# Altium PCB Projekat.PcbDoc
Units mm, origin at the board's own origin, x right, y up, seen from the top; angles counter-clockwise.
Board outline 81.41 x 129.5 mm, 2 copper layers (F.Cu, B.Cu); 62 components, 67 nets, 209 pads, 16 vias.
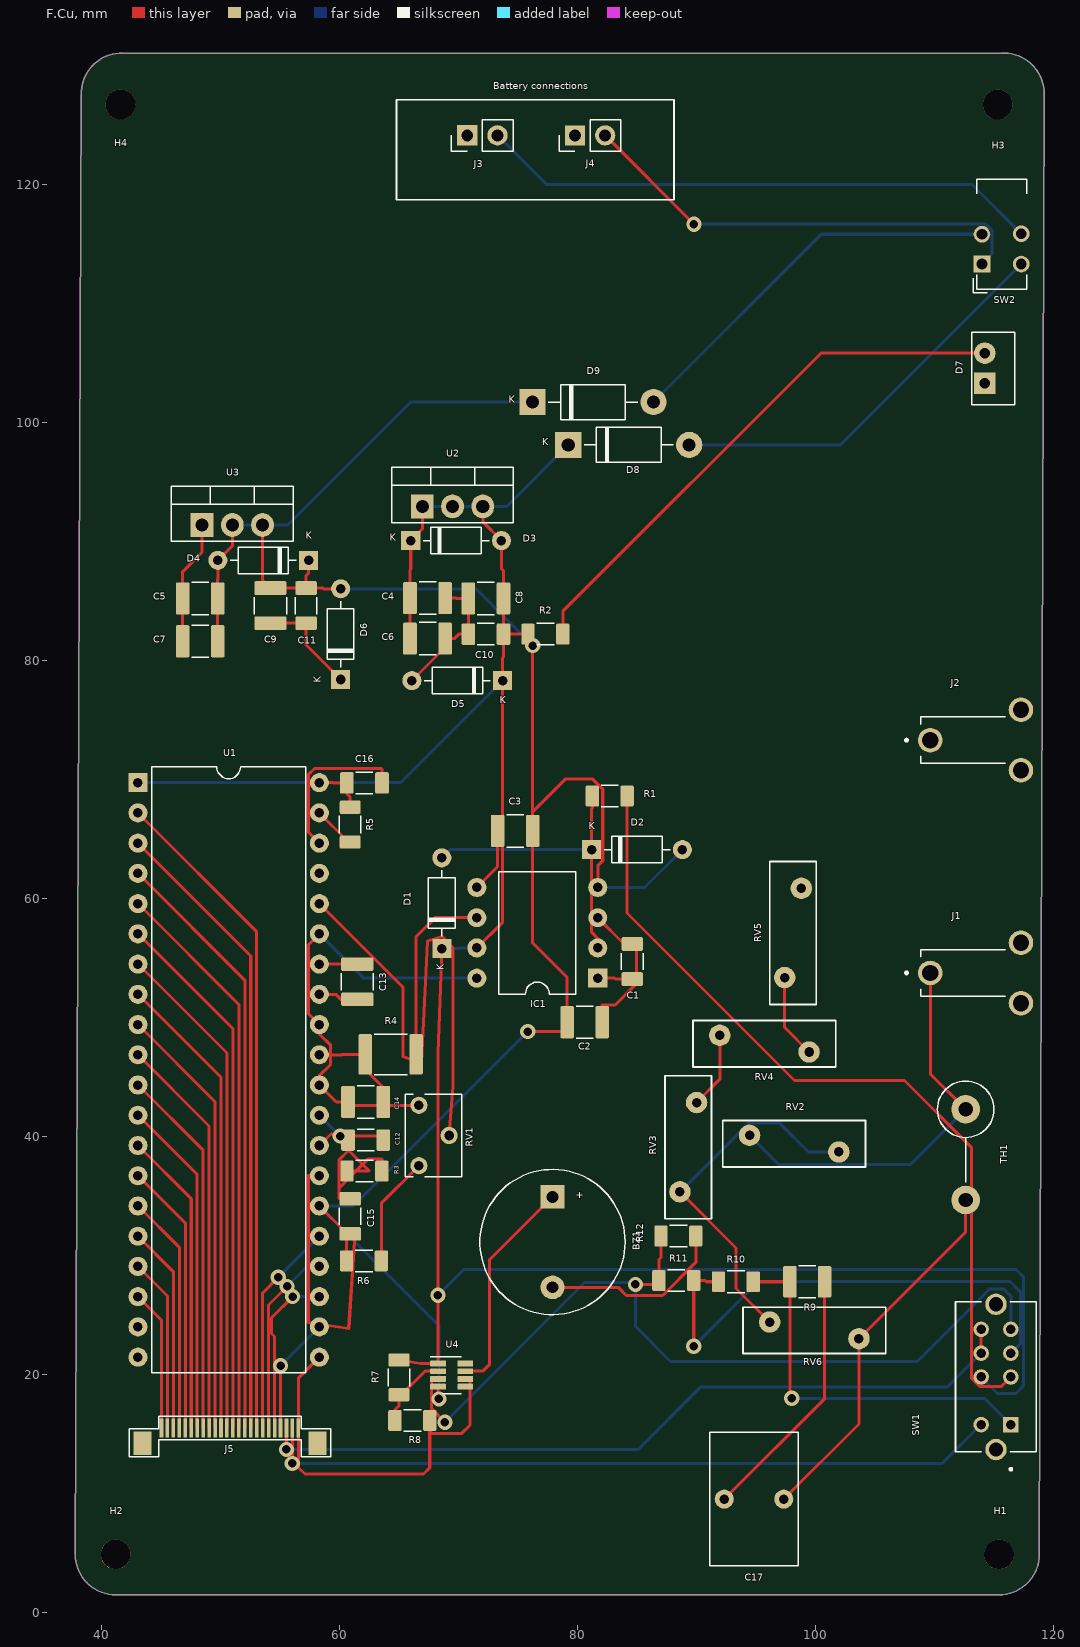
[diagram p0: F.Cu view]
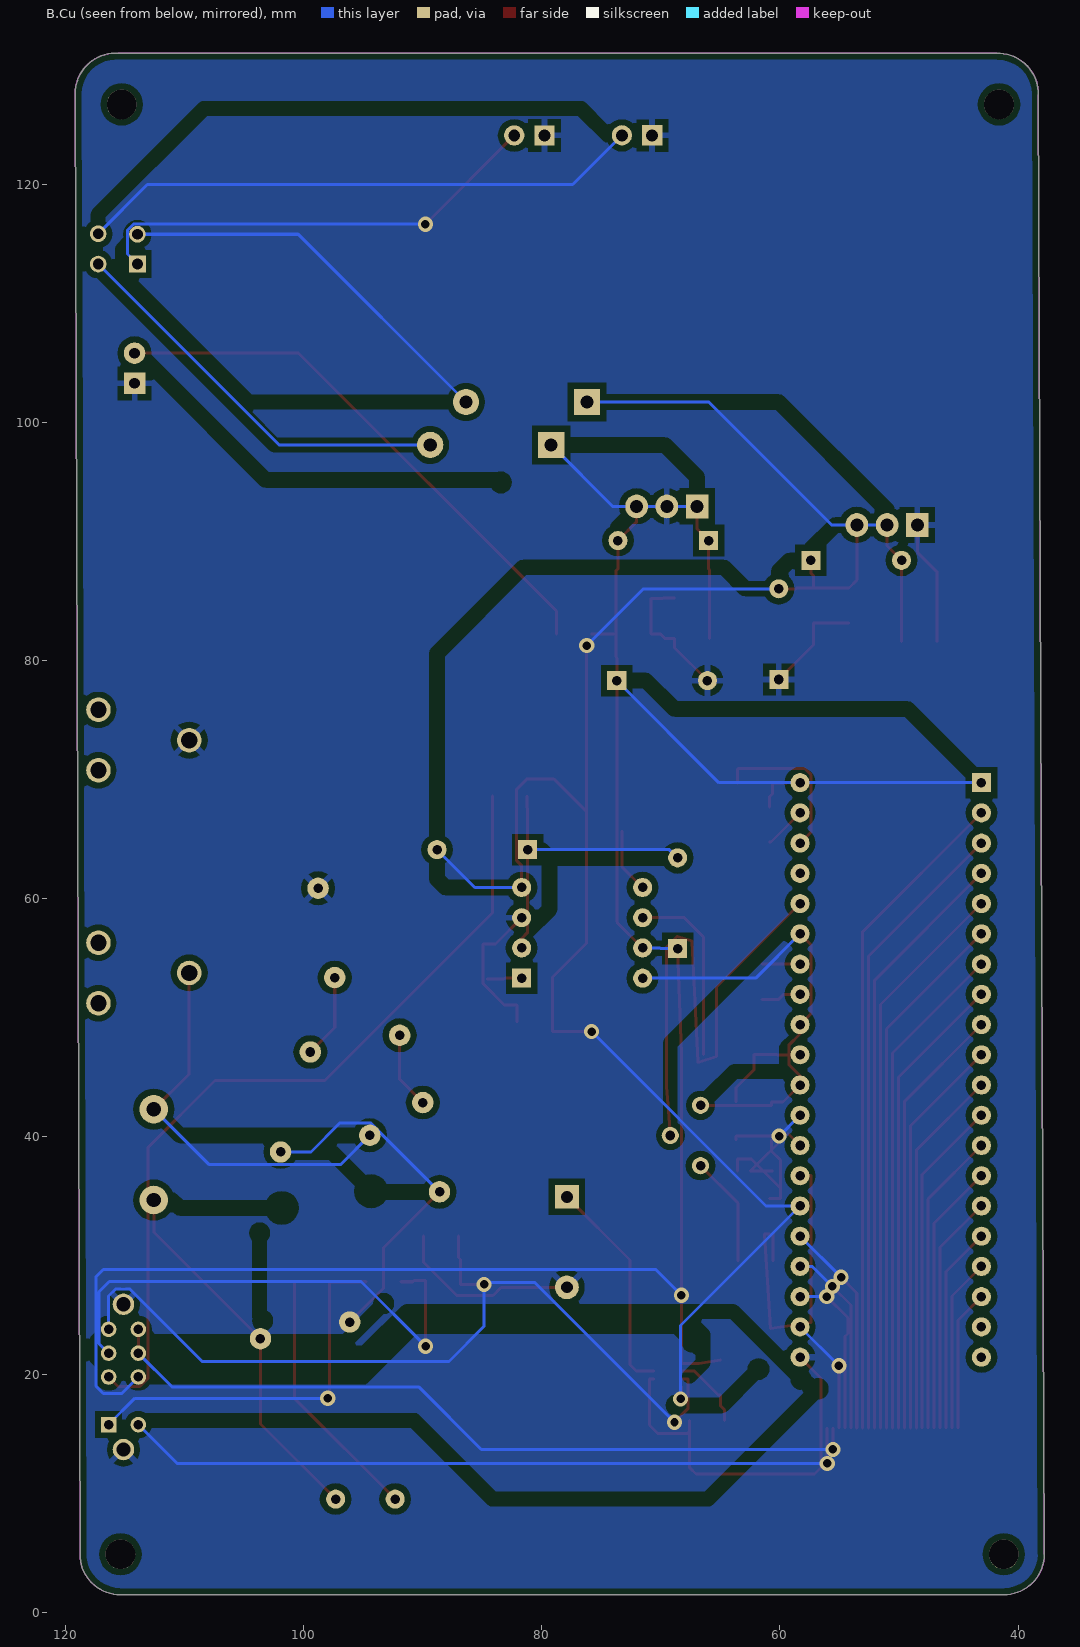
[diagram p1: B.Cu view, seen from below]

## Layer stack, top to bottom
F.Mask: solder mask 0.0102, Solder Resist, Dk 3.5
F.Cu: signal copper 0.0356
Dielectric 1: dielectric 0.32, FR-4, Dk 4.8
B.Cu: signal copper 0.0356
B.Mask: solder mask 0.0102, Solder Resist, Dk 3.5

## Board outline
37.8,4.9 38.3,127.5 cw(c41.701,127.599) 41.8,131 115.6,131 cw(c115.8,127.6) 119.206,127.6 118.8,4.9 cw(c115.4,4.9) 115.4,1.5 41.2,1.5 cw(c41.2,4.9) 37.8,4.9

## Design rules (kind name [scope] priority, off if disabled: settings)
Clearance "Clearence 0.508_Polygon" [InNamedPolygon('B.Cu-GND')] p1: gap=0.508 ignorepadtopadclearanceinfootprint=FALSE
MinimumSolderMaskSliver [All] p1: minsoldermaskwidth=0
PolygonConnect Polygon_B.Cu-GND_ConnectDirect [IsNamedPolygon('B.Cu-GND') vs IsVia] p1: connectstyle=Direct reliefconductorwidth=0.254 reliefentries=4 polygonreliefangle="90 Angle" airgapwidth=0.254
PolygonConnect Polygon_B.Cu-GND_ConnectRelief45 [IsNamedPolygon('B.Cu-GND') vs (IsThruPin or IsSMTPin) and (PadShape_AllLayers = 'Round')] p2: connectstyle=Relief reliefconductorwidth=0.508 reliefentries=4 polygonreliefangle="45 Angle" airgapwidth=0.508
PolygonConnect Polygon_B.Cu-GND_ConnectRelief90 [IsNamedPolygon('B.Cu-GND') vs (IsThruPin or IsSMTPin) and (PadShape_AllLayers <> 'Round')] p3: connectstyle=Relief reliefconductorwidth=0.508 reliefentries=4 polygonreliefangle="90 Angle" airgapwidth=0.508
RoutingVias [All] p1: holewidth=0.711 width=1.27 viastyle="Through Hole" minholewidth=0.711 minwidth=1.27 maxholewidth=0.711 maxwidth=1.27
SilkToSilkClearance [All] p1: silktosilkclearance=0
SilkToSolderMaskClearance [IsPad] p1: minsilkscreentomaskgap=0 clearancetoexposedcopper=TRUE
SolderMaskExpansion [All] p1: expansion=0.102 istentingtop=FALSE
Width [All] p1: maxlimit=10 minlimit=0.254 preferedwidth=0.254 minimp=50.000000 maximp=50.000000 favimp=50.000000
27 further rules are at their usual default settings.

## Components (designator, comment, footprint, x,y, rotation, side; value= is the part's Value field where it differs from the comment)
BZ1 "Buzzer" Buzzer_12x9.5RM7.6 77.9,34.934 r270 top
C1 "10u" C_1206_3216Metric 84.6,54.7 r90 top
C2 "1u" C_1210_3225Metric 80.6,49.6 r180 top
C3 "3u3" C_1210_3225Metric 74.76,65.678 r0 top
C4 "100u" C_1210_3225Metric 67.4,85.225 r0 top
C5 "100u" C_1210_3225Metric 48.3,85.2 r0 top
C6 "100n" C_1210_3225Metric 67.4,81.825 r0 top
C7 "100n" C_1210_3225Metric 48.3,81.6 r180 top
C8 "100n" C_1210_3225Metric 72.3,85.2 r180 top
C9 "100n" C_1210_3225Metric 54.2,84.6 r270 top
C10 "100u" C_1206_3216Metric 72.3,82.2 r180 top
C11 "100u" C_1206_3216Metric 57.2,84.6 r90 top
C12 "20p" C_1210_3225Metric 62.2,42.9 r180 top
C13 "100n" C_1210_3225Metric 61.5,53 r270 top
C14 "470n" C_1206_3216Metric 62.2,39.7 r0 top
C15 "220n" C_1206_3216Metric 60.9,33.3 r90 top
C16 "100p" C_1206_3216Metric 62.1,69.7 r0 top
C17 "22n" C_Rect_L7.2mm_W11.0mm_P5.00mm_FKS2_FKP2_MKS2_MKP2 97.326,9.544 r180 top
D1 "1N4148" D_DO-35_SOD27_P7.62mm_Horizontal 68.6,55.79 r90 top
D2 "1N4148" D_DO-35_SOD27_P7.62mm_Horizontal 81.19,64.1 r0 top
D3 "1N4448" D_DO-35_SOD27_P7.62mm_Horizontal 65.99,90.062 r0 top
D4 "1N4448" D_DO-35_SOD27_P7.62mm_Horizontal 57.41,88.4 r180 top
D5 "1N4448" D_DO-35_SOD27_P7.62mm_Horizontal 73.71,78.3 r180 top
D6 "1N4448" D_DO-35_SOD27_P7.62mm_Horizontal 60.1,78.39 r90 top
D7 "Green" LED_D5.0mm_Horizontal_O6.35mm_Z15.0mm 114.217,103.265 r90 top
D8 "1N4002" D_DO-41_SOD81_P10.16mm_Horizontal 79.22,98.1 r0 top
D9 "1N4002" D_DO-41_SOD81_P10.16mm_Horizontal 76.22,101.7 r0 top
H1 "MountingHole" MountingHole_2.5mm 115.4,4.9 r0 top
H2 "MountingHole" MountingHole_2.5mm 41.2,4.9 r0 top
H3 "MountingHole" MountingHole_2.5mm 115.3,126.7 r0 top
H4 "MountingHole" MountingHole_2.5mm 41.6,126.7 r0 top
IC1 "AD737" DIP-8_W10.16mm 81.7,53.3 r180 top
J1 "VAC" TE_350180 109.632,53.74 r0 top
J2 "COMM" TE_350180 109.632,73.298 r0 top
J3 "Battery Connector" PinHeader_1x02_P2.54mm_Vertical 70.735,124.1 r90 top
J4 "Battery Connector" PinHeader_1x02_P2.54mm_Vertical 79.78,124.098 r90 top
J5 "FPC Connector" FPC_24 50.8,15.525 r0 top
R1 "47K" R_1206_3216Metric 82.7,68.6 r0 top
R2 "330" R_1206_3216Metric 77.3,82.2 r0 top
R3 "47K" R_1206_3216Metric 62.1,37.1 r0 top
R4 "1M" R_1812_4532Metric 64.3,46.9 r0 top
R5 "100K" R_1206_3216Metric 60.9,66.2 r270 top
R6 "24K" R_1206_3216Metric 62.053,29.55 r0 top
R7 "11K" R_1206_3216Metric 65,19.762 r270 top
R8 "1K5" R_1206_3216Metric 66.124,16.148 r0 top
R9 "11M" R_1210_3225Metric 99.3,27.8 r0 top
R10 "100K" R_1206_3216Metric 93.3,27.8 r180 top
R11 "10K" R_1206_3216Metric 88.3,27.9 r180 top
R12 "1K1" R_1206_3216Metric 88.476,31.642 r0 top
RV1 "Naponska referenca" Potentiometer_Bourns_3266W_Vertical 66.675,42.625 r90 top
RV2 "910V" RV_Disc_D12mm_W3.9mm_P7.5mm 94.45,40.1 r0 top
RV3 "910V" RV_Disc_D12mm_W3.9mm_P7.5mm 88.6,35.35 r90 top
RV4 "910V" RV_Disc_D12mm_W3.9mm_P7.5mm 91.95,48.5 r0 top
RV5 "910V" RV_Disc_D12mm_W3.9mm_P7.5mm 97.4,53.35 r90 top
RV6 "910V" RV_Disc_D12mm_W3.9mm_P7.5mm 103.639,23.016 r180 top
SW1 "Range selection" SW_EG2310 115.15,19.8 r90 top
SW2 "Power ON/OFF" SW_CuK_JS202011AQN_DPDT_Angled 113.975,113.292 r90 top
TH1 "PTC" R_Axial_DIN0414_L11.9mm_D4.5mm_P7.62mm_Vertical 112.6,42.285 r270 top
U1 "ICL7107CPL" DIP-40_W15.24mm 43.075,69.725 r0 top
U2 "L7805" TO-220-3_Vertical 66.96,92.932 r0 top
U3 "L7905" TO-220-3_Vertical 48.46,91.37 r0 top
U4 "MAX9075" SOT-23-8 69.426,19.958 r0 top

## Footprints (in the part's own frame and the unit in brackets; to place one, negate y for a bottom-side part, rotate by r counter-clockwise, add the part's x,y. Pads: shape width x height; smd on the part's side, far side on the other; paste and mask are expansions set on the pad)
Buzzer_12x9.5RM7.6 [mm]
  rect 2x2 hole 1 paste-2539.97 mask+0: 1(0,0)
  round 2 hole 1 paste-2539.97 mask+0: 2(7.6,0)
  silkscreen extent -2.3,-6.1 9.9,6.1
C_1206_3216Metric [mm]
  rrect22% 1.15x1.8 smd mask+0: 1(-1.475,0) 2(1.475,0)
  silkscreen extent -0.71,-0.91 0.71,0.91
C_1210_3225Metric [mm]
  rrect22% 1.15x2.7 smd mask+0: 1(-1.475,0) 2(1.475,0)
  silkscreen extent -0.71,-1.36 0.71,1.36
C_Rect_L7.2mm_W11.0mm_P5.00mm_FKS2_FKP2_MKS2_MKP2 [mm]
  round 1.6 hole 0.8 paste-2539.97 mask+0: 1(0,0) 2(5,0)
  silkscreen extent -1.22,-5.62 6.22,5.62
D_DO-35_SOD27_P7.62mm_Horizontal [mm]
  rect 1.6x1.6 hole 0.8 paste-2539.97 mask+0: 1(0,0)
  rrect100% 1.6x1.6 hole 0.8 paste-2539.97 mask+0: 2(7.62,0)
  silkscreen extent 1.04,-1.12 6.58,1.12
D_DO-41_SOD81_P10.16mm_Horizontal [mm]
  rect 2.2x2.2 hole 1.1 paste-2539.97 mask+0: 1(0,0)
  rrect100% 2.2x2.2 hole 1.1 paste-2539.97 mask+0: 2(10.16,0)
  silkscreen extent 1.34,-1.47 8.82,1.47
DIP-8_W10.16mm [mm]
  rect 1.6x1.6 hole 0.8 paste-2539.97 mask+0: 1(0,0)
  rrect100% 1.6x1.6 hole 0.8 paste-2539.97 mask+0: 2(0,-2.54) 3(0,-5.08) 4(0,-7.62) 5(10.16,-7.62) 6(10.16,-5.08) 7(10.16,-2.54) 8(10.16,0)
  silkscreen extent 1.84,-8.95 8.31,1.33
DIP-40_W15.24mm [mm]
  rect 1.6x1.6 hole 0.8 paste-2539.97 mask+0: 1(0,0)
  rrect100% 1.6x1.6 hole 0.8 paste-2539.97 mask+0: 2(0,-2.54) 3(0,-5.08) 4(0,-7.62) 5(0,-10.16) 6(0,-12.7) 7(0,-15.24) 8(0,-17.78) 9(0,-20.32) 10(0,-22.86) 11(0,-25.4) 12(0,-27.94) 13(0,-30.48) 14(0,-33.02) 15(0,-35.56) 16(0,-38.1) 17(0,-40.64) 18(0,-43.18) 19(0,-45.72) 20(0,-48.26) 21(15.24,-48.26) 22(15.24,-45.72) 23(15.24,-43.18) 24(15.24,-40.64) 25(15.24,-38.1) 26(15.24,-35.56) 27(15.24,-33.02) 28(15.24,-30.48) 29(15.24,-27.94) 30(15.24,-25.4) 31(15.24,-22.86) 32(15.24,-20.32) 33(15.24,-17.78) 34(15.24,-15.24) 35(15.24,-12.7) 36(15.24,-10.16) 37(15.24,-7.62) 38(15.24,-5.08) 39(15.24,-2.54) 40(15.24,0)
  silkscreen extent 1.16,-49.59 14.08,1.33
FPC_24 [mm]
  rect 1.5x2 smd mask+0: 0(-7.35,-1.3) 0(7.35,-1.3)
  rect 0.3x1.6 smd mask+0: 1(-5.75,0) 2(-5.25,0) 3(-4.75,0) 4(-4.25,0) 5(-3.75,0) 6(-3.25,0) 7(-2.75,0) 8(-2.25,0) 9(-1.75,0) 10(-1.25,0) 11(-0.75,0) 12(-0.25,0) 13(0.25,0) 14(0.75,0) 15(1.25,0) 16(1.75,0) 17(2.25,0) 18(2.75,0) 19(3.25,0) 20(3.75,0) 21(4.25,0) 22(4.75,0) 23(5.25,0) 24(5.75,0)
  silkscreen extent -8.46,-2.42 8.46,0.98
LED_D5.0mm_Horizontal_O6.35mm_Z15.0mm [mm]
  rect 1.8x1.8 hole 0.9 paste-2539.97 mask+0: 1(0,0)
  round 1.8 hole 0.9 paste-2539.97 mask+0: 2(2.54,0)
  silkscreen extent -1.8,-2.5 4.3,1.1
MountingHole_2.5mm [mm]
  round 2.5 hole 2.5 paste-2539.97 mask+0: Un1(0,0)
PinHeader_1x02_P2.54mm_Vertical [mm]
  rect 1.7x1.7 hole 1 paste-2539.97 mask+0: 1(0,0)
  rrect100% 1.7x1.7 hole 1 paste-2539.97 mask+0: 2(0,-2.54)
  silkscreen extent -1.33,-3.87 1.33,1.33
Potentiometer_Bourns_3266W_Vertical [mm]
  round 1.44 hole 0.8 paste-2539.97 mask+0: 1(0,0) 2(-2.54,-2.54) 3(-5.08,0)
  silkscreen extent -6.02,-3.6 0.93,1.14
R_1206_3216Metric [mm]
  rrect22% 1.125x1.75 smd mask+0: 1(-1.463,0) 2(1.462,0)
  silkscreen extent -0.73,-0.91 0.73,0.91
R_1210_3225Metric [mm]
  rrect22% 1.125x2.65 smd mask+0: 1(-1.463,0) 2(1.463,0)
  silkscreen extent -0.72,-1.35 0.72,1.35
R_1812_4532Metric [mm]
  rrect22% 1.125x3.4 smd mask+0: 1(-2.138,0) 2(2.138,0)
  silkscreen extent -1.39,-1.71 1.39,1.71
R_Axial_DIN0414_L11.9mm_D4.5mm_P7.62mm_Vertical [mm]
  round 2.4 hole 1.2 paste-2539.97 mask+0: 1(0,0)
  rrect100% 2.4x2.4 hole 1.2 paste-2539.97 mask+0: 2(7.62,0)
  silkscreen extent -2.37,-2.37 6.12,2.37
RV_Disc_D12mm_W3.9mm_P7.5mm [mm]
  round 1.8 hole 0.8 paste-2539.97 mask+0: 1(0,0) 2(7.5,-1.4)
  silkscreen extent -2.25,-2.65 9.75,1.25
SOT-23-8 [mm]
  rrect25% 1.325x0.5 smd mask+0: 1(-1.137,0.975) 2(-1.137,0.325) 3(-1.137,-0.325) 4(-1.137,-0.975) 5(1.137,-0.975) 6(1.137,-0.325) 7(1.137,0.325) 8(1.137,0.975)
  silkscreen extent -1.8,-1.56 0.8,1.56
SW_CuK_JS202011AQN_DPDT_Angled [mm]
  rect 1.4x1.4 hole 0.9 paste-2539.97 mask+0: 1(0,0)
  round 1.4 hole 0.9 paste-2539.97 mask+0: 2(2.5,0) 3(2.54,-3.3) 4(0,-3.3)
  silkscreen extent -2.4,-3.75 7.1,0.75
SW_EG2310 [mm]
  rect 1.308x1.308 hole 0.8 paste-2539.97 mask+0.102: 1(-4,-1.25)
  round 1.308 hole 0.8 paste-2539.97 mask+0.102: 2(0,-1.25) 3(2,-1.25) 4(4,-1.25) 5(-4,1.25) 6(0,1.25) 7(2,1.25) 8(4,1.25)
  round 1.8 hole 1.2 paste-2539.97 mask+0.102: SH1(-6.1,0) SH2(6.1,0)
  silkscreen extent -7.85,-3.4 6.3,3.4
TE_350180 [mil]
  round 81 hole 54 paste-99999 mask+4.02: 1(0,0) S1(300,100) S2(300,-100)
  silkscreen extent -83,-76 247,76
TO-220-3_Vertical [mm]
  rect 1.905x2 hole 1.1 paste-2539.97 mask+0: 1(0,0)
  rrect100% 1.905x2 hole 1.1 paste-2539.97 mask+0: 2(2.54,0) 3(5.08,0)
  silkscreen extent -2.58,-1.37 7.66,3.27

## Part data
BZ1: library part Buzzer_12x9.5RM7.6, "Generic Buzzer, D12mm height 9.5mm with RM7.6mm", Sheetfile=Input.kicad_sch, Sheetname=Input
C1 C14 C15 C16: library part C_1206_3216Metric, "Capacitor SMD 1206 (3216 Metric), square (rectangular) end terminal, IPC_7351 nominal, (Body size source: IPC-SM-782 page 76, https://www.pcb-3d.com/wordpress/wp-content/uploads/ipc-sm-782a_amendment_1_and_2.pdf), generated with kicad-footprint-generator"
  C1: Sheetfile=rmstodc.kicad_sch, Sheetname=RMS-DC
  C14 C15 C16: Sheetfile=icl7107pins.kicad_sch, Sheetname=7107-PINS
C2 C3 C6 C7 C8 C9 C12 C13: library part C_1210_3225Metric, "Capacitor SMD 1210 (3225 Metric), square (rectangular) end terminal, IPC_7351 nominal, (Body size source: IPC-SM-782 page 76, https://www.pcb-3d.com/wordpress/wp-content/uploads/ipc-sm-782a_amendment_1_and_2.pdf), generated with kicad-footprint-generator"
  C2 C3: Sheetfile=rmstodc.kicad_sch, Sheetname=RMS-DC
  C6 C7 C8 C9: Sheetfile=VoltageSupply.kicad_sch, Sheetname="Voltage Supply 5V"
  C12 C13: Sheetfile=icl7107pins.kicad_sch, Sheetname=7107-PINS
C4 C5: library part C_1210_3225Metric, "Capacitor SMD 1210 (3225 Metric), square (rectangular) end terminal, IPC_7351 nominal, (Body size source: IPC-SM-782 page 76, https://www.pcb-3d.com/wordpress/wp-content/uploads/ipc-sm-782a_amendment_1_and_2.pdf), generated with kicad-footprint-generator", Rated Voltage=16V, Sheetfile=VoltageSupply.kicad_sch, Sheetname="Voltage Supply 5V"
C10 C11: library part C_1206_3216Metric, "Capacitor SMD 1206 (3216 Metric), square (rectangular) end terminal, IPC_7351 nominal, (Body size source: IPC-SM-782 page 76, https://www.pcb-3d.com/wordpress/wp-content/uploads/ipc-sm-782a_amendment_1_and_2.pdf), generated with kicad-footprint-generator", Rated Voltage=16V, Sheetfile=VoltageSupply.kicad_sch, Sheetname="Voltage Supply 5V"
C17: library part C_Rect_L7.2mm_W11.0mm_P5.00mm_FKS2_FKP2_MKS2_MKP2, "C, Rect series, Radial, pin pitch=5.00mm, , length*width=7.2*11mm^2, Capacitor, http://www.wima.com/EN/WIMA_FKS_2.pdf", Rated Voltage=1200V, Sheetfile=Input.kicad_sch, Sheetname=Input
D1 D2 D3 D4 D5 D6: library part D_DO-35_SOD27_P7.62mm_Horizontal, "Diode, DO-35_SOD27 series, Axial, Horizontal, pin pitch=7.62mm, , length*diameter=4*2mm^2, , http://www.diodes.com/_files/packages/DO-35.pdf"
  D1 D2: Sheetfile=rmstodc.kicad_sch, Sheetname=RMS-DC
  D3 D4 D5 D6: Sheetfile=VoltageSupply.kicad_sch, Sheetname="Voltage Supply 5V"
D7: library part LED_D5.0mm_Horizontal_O6.35mm_Z15.0mm, "LED, diameter 5.0mm z-position of LED center 3.0mm, 2 pins, diameter 5.0mm z-position of LED center 3.0mm, 2 pins, diameter 5.0mm z-position of LED center 3.0mm, 2 pins, diameter 5.0mm z-position of LED center 9.0mm, 2 pins, diameter 5.0mm z-position of LED center 9.0mm, 2 pins, diameter 5.0mm z-position of LED center 9.0mm, 2 pins, diameter 5.0mm z-position of LED center 15.0mm, 2 pins, diameter 5.0mm z-position of LED center 15.0mm, 2 pins, diameter 5.0mm z-position of LED center 15.0mm, 2 pins", Sheetfile=VoltageSupply.kicad_sch, Sheetname="Voltage Supply 5V"
D8 D9: library part D_DO-41_SOD81_P10.16mm_Horizontal, "Diode, DO-41_SOD81 series, Axial, Horizontal, pin pitch=10.16mm, , length*diameter=5.2*2.7mm^2, , http://www.diodes.com/_files/packages/DO-41%20(Plastic).pdf", Sheetfile=Battery.kicad_sch, Sheetname=Battery
H1 H2 H3 H4: library part MountingHole_2.5mm, "Mounting Hole 2.5mm, no annular", Sheetfile=Projekat.kicad_sch
IC1: library part DIP-8_W10.16mm, "8-lead though-hole mounted DIP package, row spacing 10.16 mm (400 mils)", Sheetfile=rmstodc.kicad_sch, Sheetname=RMS-DC
J1 J2: library part TE_350180, Sheetfile=Input.kicad_sch, Sheetname=Input
J3 J4: library part PinHeader_1x02_P2.54mm_Vertical, "Through hole straight pin header, 1x02, 2.54mm pitch, single row", Sheetfile=Battery.kicad_sch, Sheetname=Battery
J5: library part FPC_24, Sheetfile=ffccon.kicad_sch, Sheetname="FFC Connector"
R1: library part R_1206_3216Metric, "Resistor SMD 1206 (3216 Metric), square (rectangular) end terminal, IPC_7351 nominal, (Body size source: IPC-SM-782 page 72, https://www.pcb-3d.com/wordpress/wp-content/uploads/ipc-sm-782a_amendment_1_and_2.pdf), generated with kicad-footprint-generator", Power Rating=1W, Sheetfile=rmstodc.kicad_sch, Sheetname=RMS-DC
R2 R3 R5 R6 R7 R8 R10 R11 R12: library part R_1206_3216Metric, "Resistor SMD 1206 (3216 Metric), square (rectangular) end terminal, IPC_7351 nominal, (Body size source: IPC-SM-782 page 72, https://www.pcb-3d.com/wordpress/wp-content/uploads/ipc-sm-782a_amendment_1_and_2.pdf), generated with kicad-footprint-generator"
  R2: Sheetfile=VoltageSupply.kicad_sch, Sheetname="Voltage Supply 5V"
  R3 R5 R6: Sheetfile=icl7107pins.kicad_sch, Sheetname=7107-PINS
  R7 R8 R10 R11 R12: Sheetfile=Input.kicad_sch, Sheetname=Input
R4: library part R_1812_4532Metric, "Resistor SMD 1812 (4532 Metric), square (rectangular) end terminal, IPC_7351 nominal, (Body size source: https://www.nikhef.nl/pub/departments/mt/projects/detectorR_D/dtddice/ERJ2G.pdf), generated with kicad-footprint-generator", Sheetfile=icl7107pins.kicad_sch, Sheetname=7107-PINS
R9: library part R_1210_3225Metric, "Resistor SMD 1210 (3225 Metric), square (rectangular) end terminal, IPC_7351 nominal, (Body size source: IPC-SM-782 page 72, https://www.pcb-3d.com/wordpress/wp-content/uploads/ipc-sm-782a_amendment_1_and_2.pdf), generated with kicad-footprint-generator", Sheetfile=Input.kicad_sch, Sheetname=Input
RV1: library part Potentiometer_Bourns_3266W_Vertical, "Potentiometer, vertical, Bourns 3266W, https://www.bourns.com/docs/Product-Datasheets/3266.pdf", Sheetfile=icl7107pins.kicad_sch, Sheetname=7107-PINS
RV2 RV3 RV4 RV5 RV6: library part RV_Disc_D12mm_W3.9mm_P7.5mm, "Varistor, diameter 12mm, width 3.9mm, pitch 7.5mm", Sheetfile=Input.kicad_sch, Sheetname=Input
SW1: library part SW_EG2310, MANUFACTURER=E-Switch, MAXIMUM_PACKAGE_HEIGHT=4.7mm, Package=None, Availability="In Stock", Check_prices=https://www.snapeda.com/parts/EG2310/E-Switch/view-part/?ref=eda, Description="\nSlide Switch DP3T Through Hole, Right Angle\n", MF=E-Switch, MP=EG2310, PARTREV=-, Price=None, Purchase-URL=https://www.snapeda.com/api/url_track_click_mouser/?unipart_id=396456&manufacturer=E-Switch&part_name=EG2310&search_term=None, SNAPEDA_PN=EG2310, STANDARD="Manufacturer Recommendations", Sheetfile=Input.kicad_sch, Sheetname=Input, SnapEDA_Link=https://www.snapeda.com/parts/EG2310/E-Switch/view-part/?ref=snap
SW2: library part SW_CuK_JS202011AQN_DPDT_Angled, "CuK sub miniature slide switch, JS series, DPDT, right angle, http://www.ckswitches.com/media/1422/js.pdf", Sheetfile=Battery.kicad_sch, Sheetname=Battery
TH1: library part R_Axial_DIN0414_L11.9mm_D4.5mm_P7.62mm_Vertical, "Resistor, Axial_DIN0414 series, Axial, Vertical, pin pitch=7.62mm, 2W, length*diameter=11.9*4.5mm^2, http://www.vishay.com/docs/20128/wkxwrx.pdf", Sheetfile=Input.kicad_sch, Sheetname=Input
U1: library part DIP-40_W15.24mm, "40-lead though-hole mounted DIP package, row spacing 15.24 mm (600 mils)", Sheetfile=Projekat.kicad_sch
U2 U3: library part TO-220-3_Vertical, "TO-220-3, Vertical, RM 2.54mm, see https://www.vishay.com/docs/66542/to-220-1.pdf", Sheetfile=VoltageSupply.kicad_sch, Sheetname="Voltage Supply 5V"
U4: library part SOT-23-8, "SOT, 8 Pin (https://www.jedec.org/sites/default/files/docs/Mo-178c.PDF variant BA), generated with kicad-footprint-generator ipc_gullwing_generator.py", Sheetfile=Input.kicad_sch, Sheetname=Input

## Via types
v1: diameter 1.27, hole 0.711, F.Cu to B.Cu, 16 vias

## Nets (pads, with @x,y where several pads share a name; then routed paths per layer and width w, separated by ;. In a path a pad name is that pad's centre, name@x,y a point inside that pad or via, vN(x,y) a via of type N, cw(c..) or ccw(c..) an arc to the next point about the centre after c; other vN are vias at no path point)
20V_RANGE: J5.23 SW1.5 | length 62.2
  F.Cu w0.254: v1(56.032,12.548) 56.05,12.565 J5.23
  B.Cu w0.254: v1(56.032,12.548) 110.648,12.548 SW1.5
1000V_RANGE: J5.22 SW1.7 SW1.8 | length 65.5
  F.Cu w0.254: v1(55.55,13.716) J5.22 ; SW1.7 SW1.8
  B.Cu w0.254: v1(55.55,13.716) 85.09,13.716 90.348,18.974 111.074,18.974 SW1.7
+5V: C8.1 C10.1 D1.1 D3.2 D5.1 IC1.7 R2.1 R7.1 SW1.6 U1.1 U2.3 U4.1 | length 180
  F.Cu w0.254: R7.1 66.789,20.933 U4.1@68.275,20.933 ; U4.1 U4.1@68.275,20.933 ; D1.1 68.275,46.97 v1(68.275,26.67) U4.1@68.275,20.933 ; IC1.7 73.71,58.01 D5.1 73.71,80.213 73.775,80.278 C10.1 ; U2.3 72.04,91.632 D3.2 73.61,87.693 73.775,87.528 C8.1 C10.1 ; R2.1 C10.1
  B.Cu w0.254: U1.1 65.135,69.725 D5.1 ; v1(68.275,26.67) 70.434,28.829 116.84,28.829 117.45,28.219 117.45,19.025 116.84,18.415 115.285,18.415 SW1.6 ; D1.1 70.028,55.79 70.078,55.84 IC1.7
+9V: C4.1 C6.1 D3.1 D8.1 U2.1 | length 25.9
  F.Cu w0.254: C6.1 C4.1 65.925,87.605 65.99,87.67 D3.1 66.96,91.032 U2.1
  B.Cu w0.254: U2.1 74.052,92.932 D8.1
-5V: C2.2 C3.2 C9.1 C11.2 D2.2 D4.1 D6.2 IC1.4 R6.1 U1.26 U3.3 U4.4 | length 143.7
  F.Cu w0.254: U3.3 53.54,86.735 C9.1 C11.2 ; D4.1 57.41,87.332 57.2,87.122 C11.2 ; U1.26 60.591,31.889 R6.1 ; D6.2 58.663,86.01 58.598,86.075 C11.2 ; U4.4 68.289,18.021 v1(68.351,17.958) ; v1(75.819,48.819) 79.125,48.819 C2.2 79.125,53.361 76.235,56.251 C3.2 76.235,67.285 ; v1(76.235,81.245) 76.235,67.285 ; IC1.4 81.7,62.752 82.118,63.17 82.118,69.18 81.28,70.018 78.969,70.018 76.235,67.285
  B.Cu w0.254: D6.2 71.47,86.01 v1(76.235,81.245) ; v1(68.351,17.958) 68.351,24.129 U1.26 61.165,34.165 v1(75.819,48.819) ; IC1.4 85.63,60.92 D2.2
-9V: C5.2 C7.1 D4.2 D9.1 U3.2 | length 39.8
  F.Cu w0.254: C7.1 C5.2 49.775,86.792 49.79,86.807 D4.2 51,89.61 U3.2
  B.Cu w0.254: U3.2 55.651,91.37 65.981,101.7 D9.1
A-Z: C14.2 U1.29 | length 6.4
  F.Cu w0.254: v1(60.07,40.03) 63.675,40.03 C14.2
  B.Cu w0.254: U1.29 v1(60.07,40.03)
AD737_COM: C12.2 IC1.8 RV1.1 U1.30 U1.32 U1.35 | length 38.3
  F.Cu w0.254: U1.35 57.379,56.089 57.379,50.341 U1.32 58.315,48.619 59.258,47.676 59.258,46.054 58.315,45.11 U1.30 59.74,42.9 C12.2 60.725,42.625 RV1.1
  B.Cu w0.254: U1.35 62.04,53.3 IC1.8
AD737_OUTPUT: IC1.6 R4.2 | length 15.6
  F.Cu w0.254: R4.2 66.438,56.777 68.041,58.38 IC1.6
BUFF: R3.1 U1.28 | length 7.8
  F.Cu w0.254: U1.28 59.332,40.262 62.493,37.1 R3.1
Cc: C1.1 IC1.1 | length 2.9
  F.Cu w0.254: IC1.1 83.109,53.3 83.184,53.225 C1.1
CREF+: C13.1 U1.34 | length 3.2
  F.Cu w0.254: U1.34 59.893,54.485 59.903,54.475 C13.1
CREF-: C13.2 U1.33 | length 3.4
  F.Cu w0.254: U1.33 59.69,51.945 60.11,51.525 C13.2
GND: BZ1.2 C1.2 C2.1 C4.2 C5.1 C6.2 C7.2 C8.2 C9.2 C10.2 C11.1 D5.2 D6.1 D7.1 IC1.3 J2.1 J3.1 J4.1 J5.24 R8.2 R12.2 RV5.2 SW1.SH1 SW1.SH2 U1.21 U2.2 U3.1 U4.6 | length 92.8
  F.Cu w0.254: C7.2 C5.1 46.825,87.452 48.46,89.087 U3.1 ; C9.2 C11.1 57.2,81.29 D6.1 ; U1.21 56.55,19.7 J5.24 56.55,12.192 57.101,11.641 67.056,11.641 67.587,12.172 67.587,15.24 ; D5.2 68.875,81.085 C6.2 69.647,81.825 70.022,82.2 C10.2 C8.2 69.85,85.2 69.825,85.225 C4.2 ; R8.2 67.587,15.24 ; U4.6 70.968,19.633 70.968,15.748 70.282,15.062 67.764,15.062 67.587,15.24 ; BZ1.2 83.41,27.334 84.094,26.65 87.153,26.65 89.939,29.436 R12.2 ; IC1.3 83.905,56.175 C1.2 84.938,56.175 84.938,52.832 83.16,51.054 82.075,51.054 C2.1
ICL7107_A1: J5.14 U1.5 | length 47.6
  F.Cu w0.254: U1.5 51.55,51.09 J5.14
ICL7107_A2: J5.7 U1.12 | length 28.3
  F.Cu w0.254: U1.12 48.05,36.81 J5.7
ICL7107_A3: J5.20 U1.23 | length 14.1
  F.Cu w0.254: J5.20 54.55,23.199 54.288,23.461 54.288,24.765 v1(56.068,26.545)
  B.Cu w0.254: v1(56.068,26.545) U1.23
ICL7107_AB4: U1.19
ICL7107_B1: J5.15 U1.4 | length 50.3
  F.Cu w0.254: U1.4 52.05,53.13 J5.15
ICL7107_B2: J5.8 U1.11 | length 31.1
  F.Cu w0.254: U1.11 48.55,38.85 J5.8
ICL7107_B3: J5.3 U1.16 | length 17.3
  F.Cu w0.254: U1.16 46.05,28.65 J5.3
ICL7107_C1: J5.16 U1.3 | length 53
  F.Cu w0.254: U1.3 52.55,55.17 J5.16
ICL7107_C2: J5.9 U1.10 | length 33.8
  F.Cu w0.254: U1.10 49.05,40.89 J5.9
ICL7107_C3: J5.19 U1.24 | length 15.9
  F.Cu w0.254: J5.19 54.05,22.973 54.034,22.989 54.034,25.84 v1(55.601,27.407)
  B.Cu w0.254: v1(55.601,27.407) 57.279,29.085 U1.24
ICL7107_D1: J5.17 U1.2 | length 55.8
  F.Cu w0.254: U1.2 53.05,57.21 J5.17
ICL7107_D2: J5.10 U1.9 | length 36.6
  F.Cu w0.254: U1.9 49.55,42.93 J5.10
ICL7107_D3: J5.4 U1.15 | length 20.1
  F.Cu w0.254: U1.15 46.55,30.69 J5.4
ICL7107_E1: J5.11 U1.8 | length 39.3
  F.Cu w0.254: U1.8 50.05,44.97 J5.11
ICL7107_E2: J5.5 U1.14 | length 22.8
  F.Cu w0.254: U1.14 47.05,32.73 J5.5
ICL7107_E3: J5.1 U1.18 | length 11.8
  F.Cu w0.254: U1.18 45.05,24.57 J5.1
ICL7107_F1: J5.13 U1.6 | length 44.8
  F.Cu w0.254: U1.6 51.05,49.05 J5.13
ICL7107_F2: J5.6 U1.13 | length 25.6
  F.Cu w0.254: U1.13 47.55,34.77 J5.6
ICL7107_F3: J5.2 U1.17 | length 14.6
  F.Cu w0.254: U1.17 45.55,26.61 J5.2
ICL7107_G1: J5.12 U1.7 | length 42.1
  F.Cu w0.254: U1.7 50.55,47.01 J5.12
ICL7107_G2: J5.18 U1.25 | length 18.1
  F.Cu w0.254: J5.18 53.55,26.86 v1(54.864,28.174)
  B.Cu w0.254: v1(54.864,28.174) U1.25
ICL7107_G3: J5.21 U1.22 | length 9.8
  F.Cu w0.254: J5.21 v1(55.05,20.74)
  B.Cu w0.254: v1(55.05,20.74) U1.22
IN_HI: C12.1 R4.1 U1.31 | length 8.5
  F.Cu w0.254: U1.31 60.198,46.865 60.233,46.9 R4.1 62.162,45.632 63.675,44.12 C12.1
INT: C15.1 U1.27 | length 25.1
  F.Cu w0.254: U1.27 58.315,36.728 57.379,36.728 57.379,24.384 60.782,23.876 61.289,31.8 61.29,31.825 C15.1
Net-(C3-Pad1): C3.1 IC1.5 | length 5.5
  F.Cu w0.254: IC1.5 73.285,62.665 C3.1
Net-(C14-Pad1): C14.1 C15.2 R3.2 | length 11.9
  F.Cu w0.254: C14.1 60.725,38.779 59.944,37.998 59.944,35.639 ; C15.2 59.944,34.775 59.944,35.639 ; R3.2 63.562,38.125 62.431,38.125 59.944,35.639
Net-(C17-Pad1): C17.1 RV6.1 TH1.2 | length 31.4
  F.Cu w0.254: C17.1 103.639,15.857 RV6.1 112.6,31.977 TH1.2
Net-(C17-Pad2): C17.2 R9.2 | length 21.8
  F.Cu w0.254: C17.2 100.763,17.981 R9.2
Net-(D1-Pad2): D1.2 D2.1 IC1.2 R1.1 | length 25.9
  F.Cu w0.254: R1.1 81.237,67.605 81.19,67.557 D2.1 81.19,57.152 81.7,56.642 IC1.2
  B.Cu w0.254: D1.2 69.29,64.1 D2.1
Net-(D7-Pad2): D7.2 R2.2 | length 46.4
  F.Cu w0.254: R2.2 78.763,84.122 100.446,105.805 D7.2
Net-(D8-Pad2): D8.2 SW2.4 | length 34.2
  B.Cu w0.254: D8.2 102.082,98.1 SW2.4
Net-(D9-Pad2): D9.2 SW2.2 | length 33.4
  B.Cu w0.254: D9.2 100.472,115.793 SW2.2
Net-(J1-Pad1): J1.1 RV2.1 TH1.1 | length 33.8
  F.Cu w0.254: J1.1 109.631,45.254 TH1.1
  B.Cu w0.254: RV2.1 96.882,37.668 107.983,37.668 TH1.1
Net-(J3-Pad2): J3.2 SW2.3 | length 47.4
  B.Cu w0.254: J3.2 77.411,119.964 113.143,119.964 SW2.3
Net-(J4-Pad2): J4.2 SW2.1 | length 39
  F.Cu w0.254: J4.2 v1(89.781,116.637)
  B.Cu w0.254: v1(89.781,116.637) 114.3,116.637 114.808,116.129 114.808,114.126 SW2.1
Net-(R6-Pad2): R6.2 RV1.3 | length 9.3
  F.Cu w0.254: R6.2 63.516,34.386 RV1.3
Net-(R7-Pad2): R7.2 R8.1 U4.2 | length 6.4
  F.Cu w0.254: R8.1 64.661,17.043 65,17.382 R7.2 65.202,18.3 67.185,20.283 U4.2
Net-(R10-Pad1): R9.1 R10.1 SW1.1 | length 32.3
  F.Cu w0.254: R10.1 R9.1 97.837,18.164 v1(97.993,18.009)
  B.Cu w0.254: v1(97.993,18.009) 114.191,18.009 SW1.1
Net-(R10-Pad2): R10.2 R11.1 SW1.3 | length 43.2
  F.Cu w0.254: v1(89.762,22.377) R11.1 90.729,27.9 90.829,27.8 R10.2
  B.Cu w0.254: v1(89.762,22.377) 95.198,27.813 116.332,27.813 117.196,26.949 117.196,22.596 SW1.3
Net-(RV2-Pad2): RV2.2 RV3.1 RV6.2 | length 30.8
  F.Cu w0.254: RV3.1 93.32,30.63 93.32,27.235 RV6.2
  B.Cu w0.254: RV3.1 88.621,35.35 94.419,41.148 96.952,41.148 99.4,38.7 RV2.2
Net-(RV3-Pad2): RV3.2 RV4.1 | length 6.5
  F.Cu w0.254: RV3.2 91.95,44.8 RV4.1
Net-(RV4-Pad2): RV4.2 RV5.1 | length 7.1
  F.Cu w0.254: RV5.1 97.4,49.15 RV4.2
Net-(U4-Pad3): R11.2 R12.1 SW1.4 U4.3 | length 73.5
  F.Cu w0.254: U4.3 67.742,19.633 67.742,17.12 v1(68.859,16.002) ; v1(84.861,27.584) 86.838,27.584 R11.2 86.838,29.667 87.013,29.843 R12.1
  B.Cu w0.254: v1(68.859,16.002) 80.594,27.737 84.709,27.737 v1(84.861,27.584) 84.861,24.054 87.808,21.107 108.534,21.107 114.605,27.178 115.824,27.178 116.4,26.602 SW1.4
Net-(U4-Pad7): BZ1.1 U4.7 | length 18.6
  F.Cu w0.254: U4.7 72.048,20.283 72.593,20.828 72.593,29.627 BZ1.1
OSC1: C16.1 R5.1 U1.40 | length 4.5
  F.Cu w0.254: U1.40 59.436,69.725 59.461,69.7 C16.1 60.625,68.804 60.9,68.529 R5.1
OSC2: R5.2 U1.39 | length 3.6
  F.Cu w0.254: U1.39 60.762,64.737 R5.2
OSC3: C16.2 U1.38 | length 13.7
  F.Cu w0.254: U1.38 57.379,65.581 57.379,70.383 57.912,70.917 63.525,70.917 63.575,70.867 C16.2
REF_HI: RV1.2 U1.36 | length 46
  F.Cu w0.254: U1.36 65.329,52.551 65.329,46.736 66.878,46.228 67.386,56.413 68.631,56.794 69.545,55.88 69.545,44.221 RV1.2
unconnected-(U1-Pad20): U1.20
unconnected-(U1-Pad37): U1.37
unconnected-(U4-Pad5): U4.5
unconnected-(U4-Pad8): U4.8
Vin: R1.2 SW1.2 | length 70.2
  F.Cu w0.254: R1.2 84.162,58.776 98.234,44.704 107.467,44.704 113.106,39.065 113.106,19.685 113.792,18.999 115.599,18.999 SW1.2
pads on no net: H1.Un1 H2.Un1 H3.Un1 H4.Un1 J1.S1 J1.S2 J2.S1 J2.S2 J5.0

## Polygon pours and split planes (outlines as drawn)
GND on B.Cu "B.Cu-GND" (solid, remove dead copper, pour order 0): 121.3,0.6 36.4,0 36.2,132.2 36.1,132.2 121.3,132.3

## Keep-outs
Edge.Cuts:
  lines w0.1: 37.8,4.9 ccw(c41.2,4.9) 41.2,1.5 ; 37.8,4.9 ccw(c41.2,4.9) 41.2,1.5 ; 37.8,4.9 38.3,127.5 ; 37.8,4.9 38.3,127.5 ; 38.3,127.5 cw(c41.701,127.599) 41.8,131 ; 38.3,127.5 cw(c41.701,127.599) 41.8,131 ; 41.2,1.5 115.4,1.5 ; 41.2,1.5 115.4,1.5 ; 41.8,131 115.6,131 ; 41.8,131 115.6,131 ; 115.4,1.5 ccw(c115.4,4.9) 118.8,4.9 ; 115.4,1.5 ccw(c115.4,4.9) 118.8,4.9 ; 115.6,131 cw(c115.8,127.6) 119.206,127.6 ; 115.6,131 cw(c115.8,127.6) 119.206,127.6 ; 118.8,4.9 119.206,127.6 ; 118.8,4.9 119.206,127.6

## Silkscreen, mask and mechanical layers (free items; w line width, h text height)
F.SilkS:
  lines w0.15: 64.8,118.7 88.1,118.7 88.1,127.1 64.8,127.1 64.8,118.7
  text "Battery connections" at 72.913,127.748 h1

## Text inside footprints (layer, text, board x,y; h text height)
BZ1: F.Fab "+" at 80.651,34.733 h1 r90; F.SilkS "+" at 80.651,34.733 h1 r90
D1: F.Fab "K" at 68.984,53.984 h1 r90; F.SilkS "K" at 68.984,53.984 h1 r90
D2: F.Fab "K" at 80.926,65.58 h1; F.SilkS "K" at 80.926,65.58 h1
D3: F.Fab "K" at 64.236,89.842 h1; F.SilkS "K" at 64.236,89.842 h1
D4: F.Fab "K" at 57.154,89.99 h1; F.SilkS "K" at 57.154,89.99 h1
D5: F.Fab "K" at 73.446,76.18 h1; F.SilkS "K" at 73.446,76.18 h1
D6: F.Fab "K" at 58.62,78.126 h1 r90; F.SilkS "K" at 58.62,78.126 h1 r90
D8: F.Fab "K" at 77.036,97.87 h1; F.SilkS "K" at 77.036,97.87 h1
D9: F.Fab "K" at 74.242,101.426 h1; F.SilkS "K" at 74.242,101.426 h1